# Altium PCB DS1307.PcbDoc
Units mil, origin at the board's own origin, x right, y up, seen from the top; angles counter-clockwise.
Board outline 2810 x 2472.01 mil, 2 copper layers (Top Layer, Bottom Layer); 38 components, 48 nets, 155 pads, 21 vias.
Unrouted connection lines stored in the file: 1.
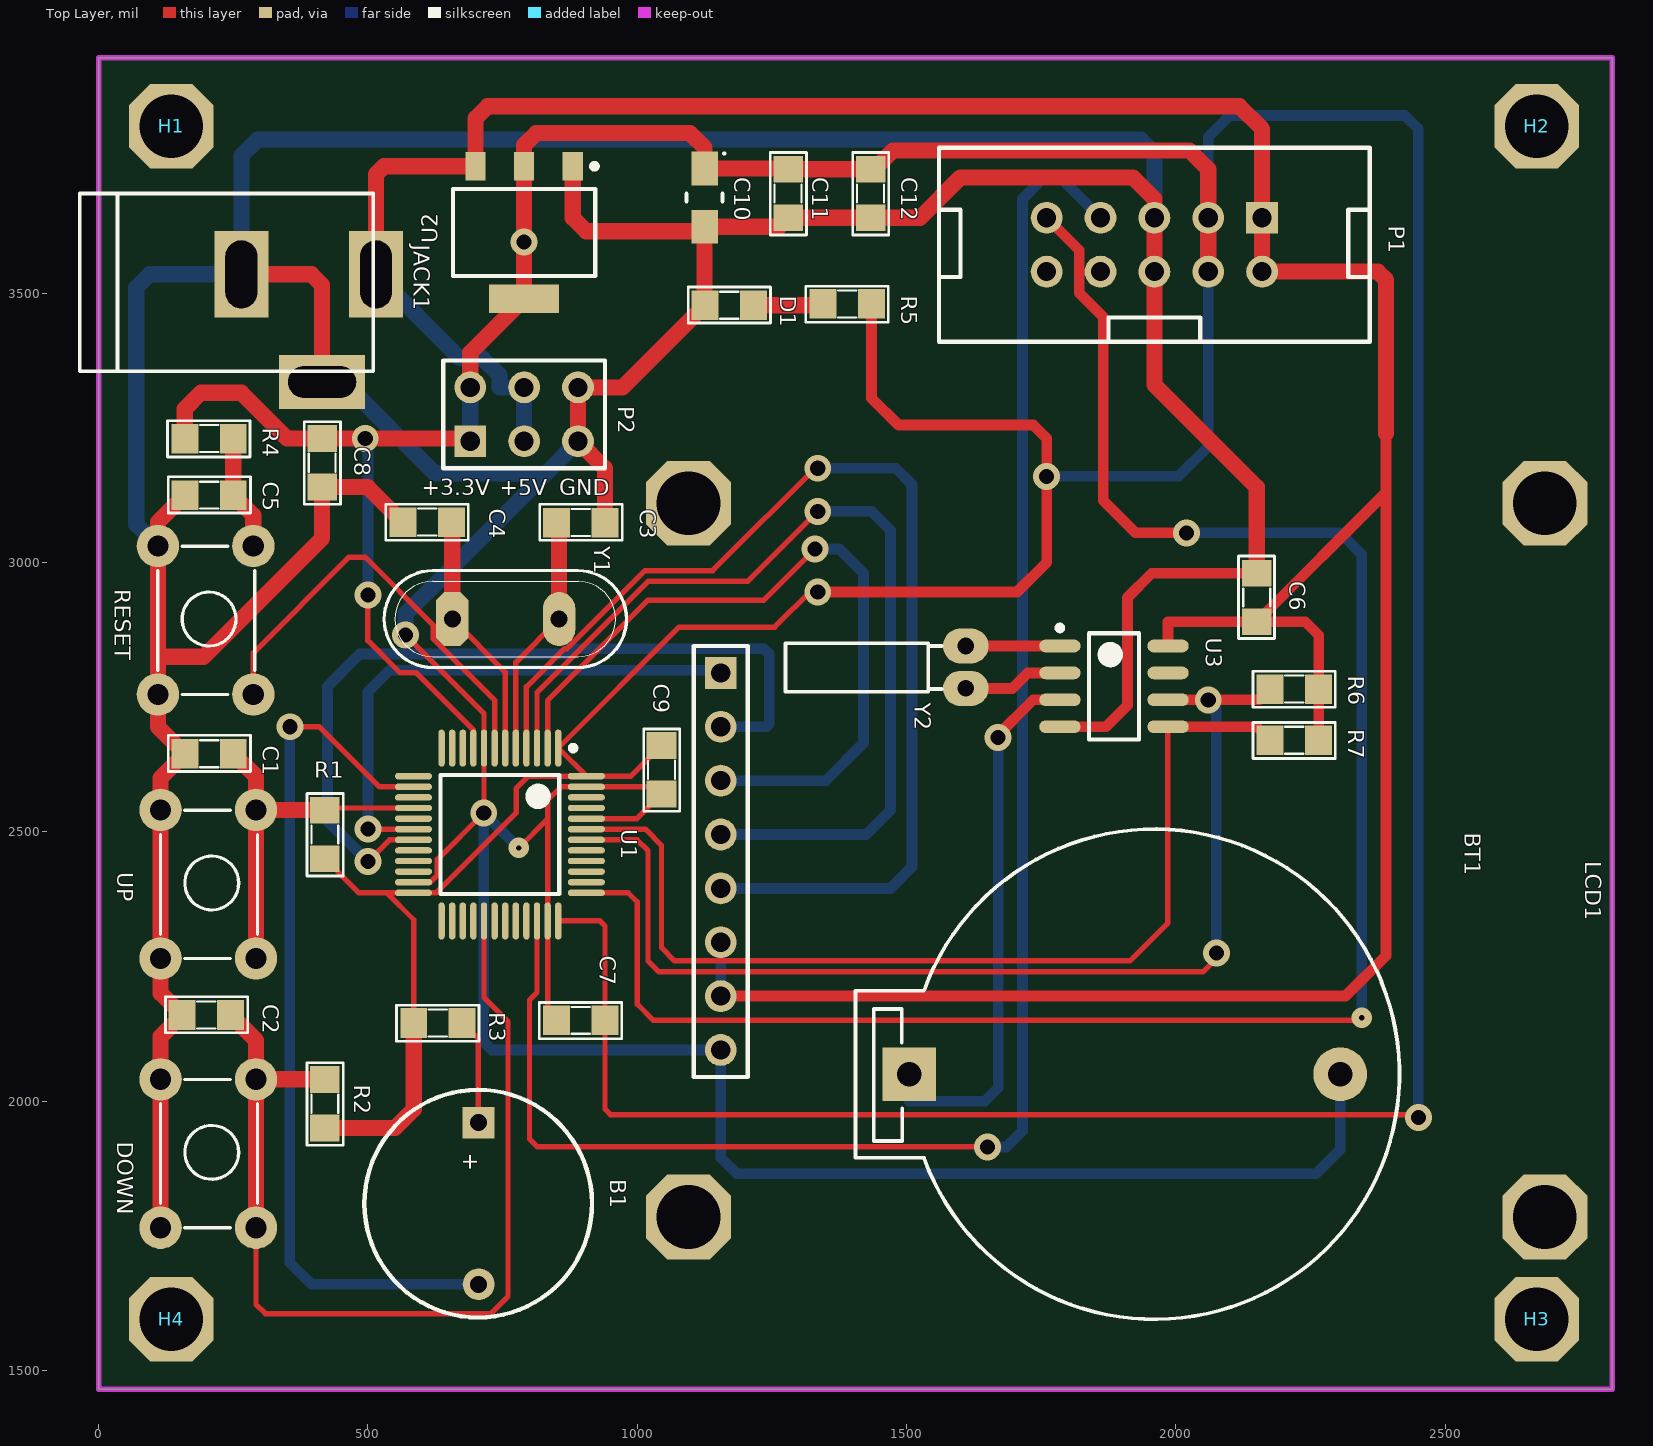
[diagram p0: Top Layer view]
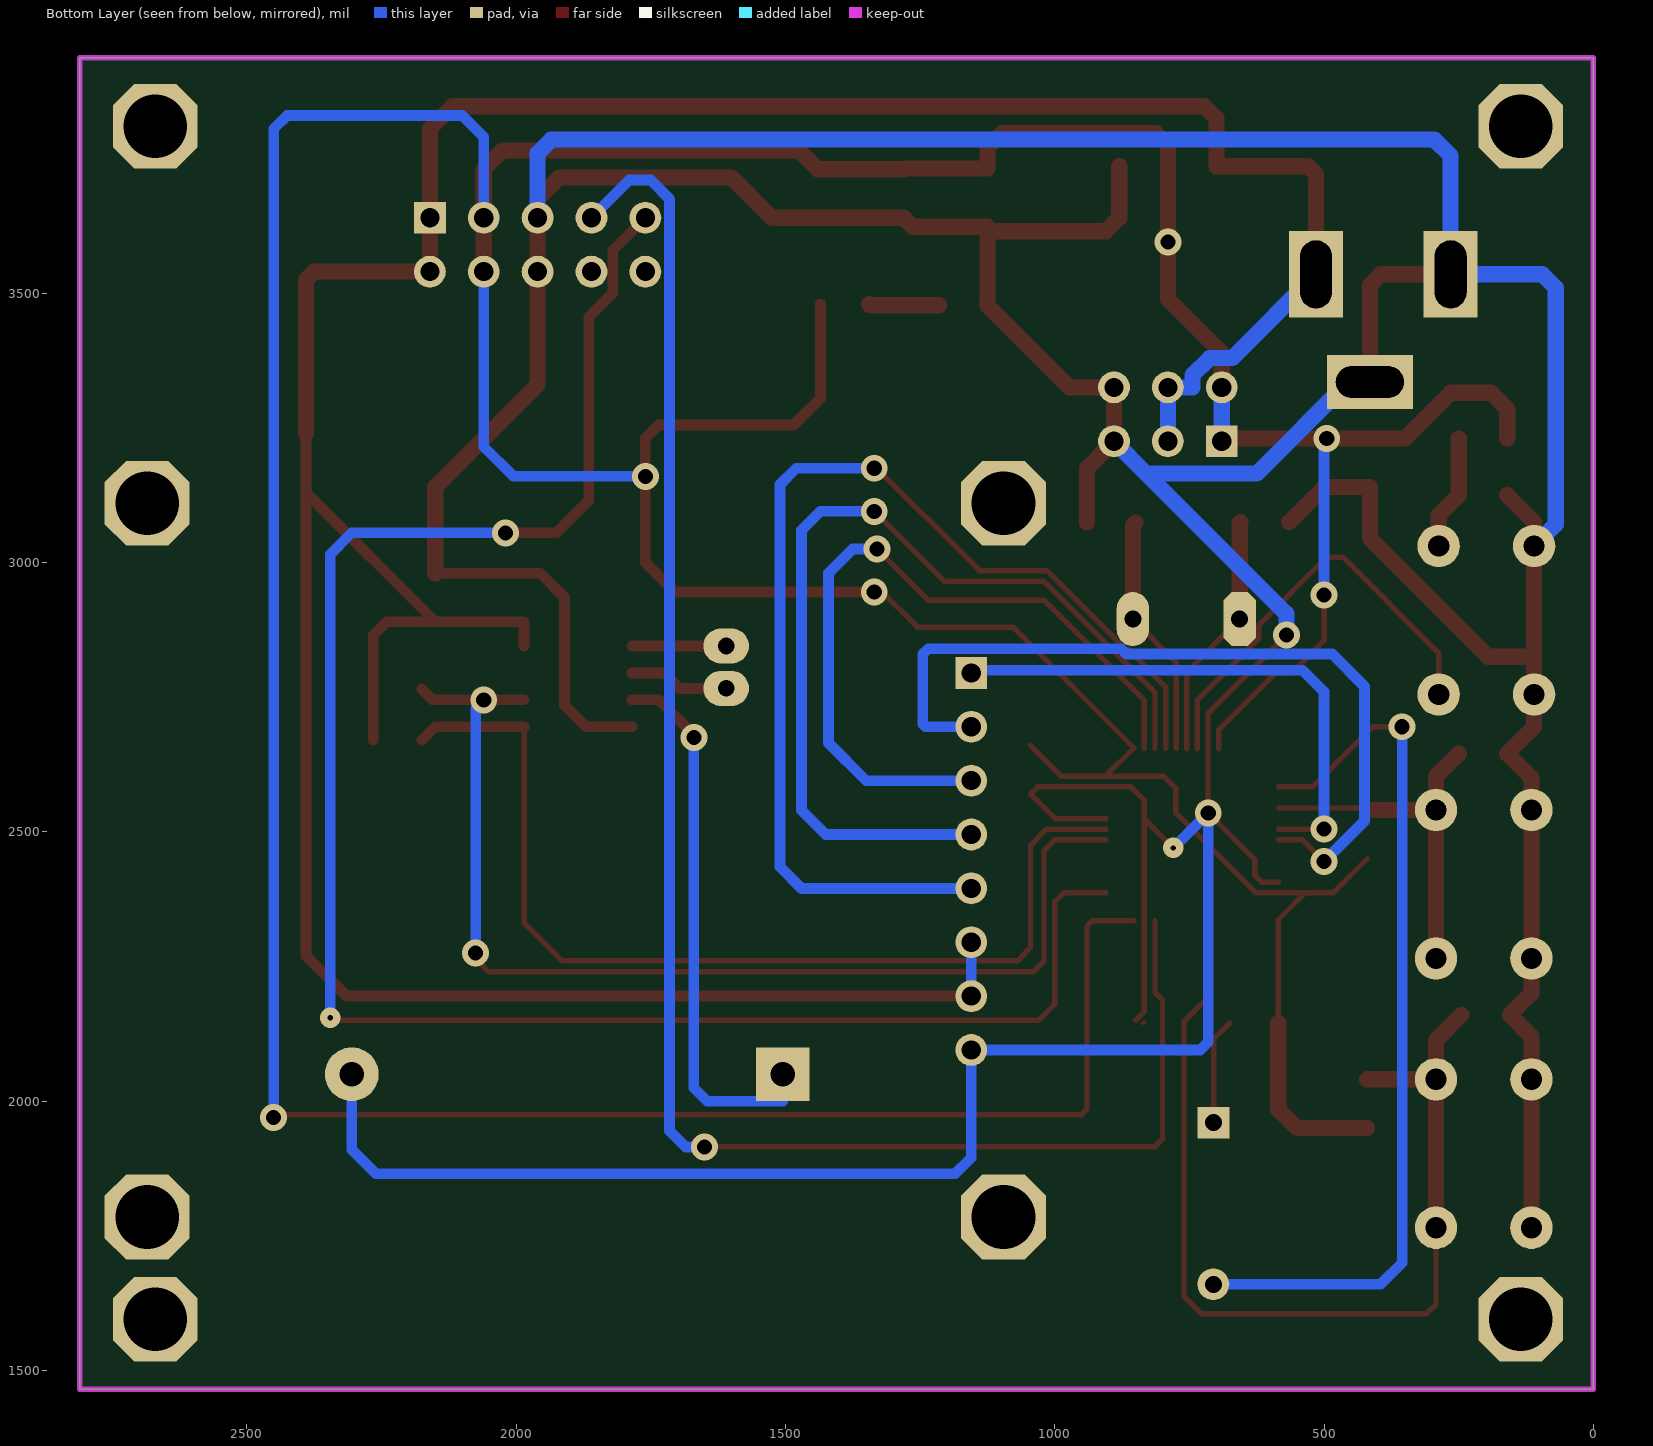
[diagram p1: Bottom Layer view, seen from below]

## Layer stack, top to bottom
Top Solder: solder mask 0.4, Solder Resist, Dk 3.5
Top Layer: signal copper 1.4
Dielectric 1: dielectric 12.6, FR-4, Dk 4.8
Bottom Layer: signal copper 1.4
Bottom Solder: solder mask 0.4, Solder Resist, Dk 3.5

## Board outline
0,1465 2810,1465 2810,3937.01 0,3937.01

## Design rules (kind name [scope] priority, off if disabled: settings)
Clearance MCU [HasFootprint('LQFP 48 Pin')] p1: gap=5
Clearance [All] p2: gap=20
PolygonConnect [All] p1: connectstyle=Relief reliefconductorwidth=10 reliefentries=4 polygonreliefangle="90 Angle" airgapwidth=10
RoutingVias [All] p1: holewidth=10 width=38 viastyle="Through Hole" minholewidth=10 minwidth=38 maxholewidth=10 maxwidth=38
SolderMaskExpansion [All] p1: expansion=4
Width [All] p1: maxlimit=30 minlimit=10 preferedwidth=20
30 further rules are at their usual default settings.

## Classes and differential pairs
component class KIT_STM32_Version3: B1 BT1 C1 C2 C3 C4 C5 C6 C7 C8 C9 C10 C11 C12 D1 H1 H2 H3 H4 JACK1 LCD1 P2 R1 R2 R3 R4 R6 R7 RESET S3 U2 U3 UP Y1 Y2

## Components (designator, comment, footprint, x,y, rotation, side; value= is the part's Value field where it differs from the comment)
B1 "BUZZER" SPEAKER 705,1960 r270 top
BT1 "PIN 3V" PIN3V 1505,2050 r0 top
C1 "100nF" "0805 CAP" 205,2645 r180 top
C2 "100nF" "0805 CAP" 200,2160 r180 top
C3 "20pF" "0805 CAP" 895,3074 r180 top
C4 "20pF" "0805 CAP" 610,3075 r0 top
C5 "100nF" "0805 CAP" 205,3125 r180 top
C6 "104" "0805 CAP" 2150,2935 r270 top
C7 "104" "0805 CAP" 895,2150 r0 top
C8 "104" "0805 CAP" 415,3185 r90 top
C9 "104" "0805 CAP" 1045,2615 r90 top
C10 "10uF" CAPMP3216X16N 1125,3677.48 r270 top
C11 "105" "0805 CAP" 1280,3685 r90 top
C12 "104" "0805 CAP" 1433.11,3685 r90 top
D1 "LED" "LED SMD 0805" 1170,3475 r180 top
DOWN "" "SW 4PIN" 115,1765 r90 top (schematic designator S2)
H1 "HOLE" HOLE 135,3810 r0 top
H2 "HOLE" HOLE 2670,3810 r0 top
H3 "HOLE" HOLE 2670,1595 r0 top
H4 "HOLE" HOLE 135,1595 r0 top
JACK1 "JACK DC" "JACK DC" 390,3435 r0 top
LCD1 "LCD 5110" "LCD 5110" 1155,2795 r270 top
P1 "ST-LINK" "IDC10 MALE" 2160,3640 r180 top
P2 "Header 3X2" HDR2X3 690,3225 r0 top
R1 "10k" "0805 RESISTOR" 420,2495 r90 top
R2 "10k" "0805 RESISTOR" 420,1995 r90 top
R3 "0" "0805 RESISTOR" 630,2145 r0 top
R4 "10k" "0805 RESISTOR" 205,3230 r0 top
R5 "1k" "0805 RESISTOR" 1390,3480 r0 top
R6 "4.7k" "0805 RESISTOR" 2220,2765 r0 top
R7 "4.7k" "0805 RESISTOR" 2220,2670 r0 top
RESET "" "SW 4PIN" 110,2755 r90 top (schematic designator S3)
U1 "STM32F103x8/B-LQFP48" "LQFP 48 PIN" 745,2495 r270 top
U2 "AMS1117" "SOT223 - 3 LEAD" 790,3612.52 r270 top
U3 "DS1307" "SOIC 8PIN" 1885,2770 r0 top
UP "" "SW 4PIN" 115,2265 r90 top (schematic designator S1)
Y1 "8MHz" "CRYSTAL DIP" 755,2895 r0 top
Y2 "32.768KHz" "XTAL 32kHz" 1610,2845 r180 top

## Footprints (in the part's own frame and the unit in brackets; to place one, negate y for a bottom-side part, rotate by r counter-clockwise, add the part's x,y. Pads: shape width x height; smd on the part's side, far side on the other; paste and mask are expansions set on the pad)
"0805 CAP" [mil] "Compoment SMD 80x50mil"
  rect 50x55 smd: 1(-45,0) 2(45,0)
  silkscreen extent -77,-34 76,33, body extent -40,-25 40,25, height 24
"0805 RESISTOR" [mil] "Compoment SMD 80x50mil"
  rect 50x55 smd: 1(-45,0) 2(45,0)
  silkscreen extent -77,-34 76,33, body extent -39,-25 39,25, height 24
CAPMP3216X16N [mm] "Molded Capacitor, 2-Leads, Body 3.20x1.60mm, IPC Medium Density"
  rect 1.6x1.25 smd: 1(-1.375,0) 2(1.375,0)
  silkscreen extent -2.12,-0.85 0.18,0.97, body extent -1.7,-0.9 1.7,0.9, height 1.8
"CRYSTAL DIP" [mil]
  oct 60x100 hole 31.5: 1(-98.43,0)
  oval 60x100 hole 31.5: 2(100,0)
  silkscreen extent -225,-90 225,90, body extent -221,-93 225,91, height 138
HDR2X3 [mm] "Connector; Header; 3x2 Position"
  rect 1.5x1.5 hole 0.9: 1(0,0)
  round 1.5 hole 0.9: 2(0,2.54) 3(2.54,0) 4(2.54,2.54) 5(5.08,0) 6(5.08,2.54)
  silkscreen extent -1.27,-1.27 6.35,3.81, body extent -1.27,-1.27 6.35,3.81, height 7
HOLE [mm]
  oct 4x4 hole 3: H(0,0)
"IDC10 MALE" [mm] "Connector; Header; 5x2 Position"
  rect 1.5x1.5 hole 0.9: 1(0,0)
  round 1.5 hole 0.9: 2(0,2.54) 3(2.54,0) 4(2.54,2.54) 5(5.08,0) 6(5.08,2.54) 7(7.62,0) 8(7.62,2.54) 9(10.16,0) 10(10.16,2.54)
  silkscreen extent -5.08,-3.3 15.24,5.84, body extent -5.08,-3.28 15.24,5.82, height 9
"JACK DC" [mil] "Jac DC input"
  rect 100x160 hole 59.06 slot 125.98 at 90 deg: 1(125,100) 2(-125,100)
  rect 160x100 hole 59.06 slot 125.98 at 0 deg: 3(25,-100)
  silkscreen extent -425,-80 120,250, body extent -410,-105 134,269, height 434
"LCD 5110" [mm]
  rect 1.5x1.5 hole 0.9: 1(0,0)
  round 1.5 hole 0.9: 2(2.54,0) 3(5.08,0) 4(7.62,0) 5(10.16,0) 6(12.7,0) 7(15.24,0) 8(17.78,0)
  oct 4x4 hole 3: ""(-8.001,38.862) ""(-8.001,-1.524) ""(25.654,38.862) ""(25.654,-1.524)
  silkscreen extent -1.27,-1.27 19.05,1.27, body extent -12.46,-4 30.24,41.4, height 14
"LED SMD 0805" [mil] "Compoment SMD 80x50mil"
  rect 50x55 smd: 1(-45.39,-2.58) 2(44.61,-2.58)
  silkscreen extent -77,-37 76,30, body extent -41,-21 41,15, height 33
"LQFP 48 PIN" [mm] "TSQFP, 48-Leads, Body 9.2x9.2mm (max), Pitch 0.50mm, IPC Medium Density"
  oval 1.75x0.3 smd: 1(-4.075,2.75) 2(-4.075,2.25) 3(-4.075,1.75) 4(-4.075,1.25) 5(-4.075,0.75) 6(-4.075,0.25) 7(-4.075,-0.25) 8(-4.075,-0.75) 9(-4.075,-1.25) 10(-4.075,-1.75) 11(-4.075,-2.25) 12(-4.075,-2.75) 25(4.075,-2.75) 26(4.075,-2.25) 27(4.075,-1.75) 28(4.075,-1.25) 29(4.075,-0.75) 30(4.075,-0.25) 31(4.075,0.25) 32(4.075,0.75) 33(4.075,1.25) 34(4.075,1.75) 35(4.075,2.25) 36(4.075,2.75)
  oval 0.3x1.75 smd: 13(-2.75,-4.075) 14(-2.25,-4.075) 15(-1.75,-4.075) 16(-1.25,-4.075) 17(-0.75,-4.075) 18(-0.25,-4.075) 19(0.25,-4.075) 20(0.75,-4.075) 21(1.25,-4.075) 22(1.75,-4.075) 23(2.25,-4.075) 24(2.75,-4.075) 37(2.75,4.075) 38(2.25,4.075) 39(1.75,4.075) 40(1.25,4.075) 41(0.75,4.075) 42(0.25,4.075) 43(-0.25,4.075) 44(-0.75,4.075) 45(-1.25,4.075) 46(-1.75,4.075) 47(-2.25,4.075) 48(-2.75,4.075)
  silkscreen extent -4.2,-2.8 2.8,3.58, body extent -4.5,-4.5 4.5,4.5, height 1.45
PIN3V [mil] "Socket PIN 3V"
  rect 100x100 hole 45: 1(0,0)
  round 100 hole 45: 2(800,0)
  silkscreen extent -100,-455 910,455, body extent -128,-447 1002,449, height 278
"SOIC 8PIN" [mm]
  oval 1.95x0.6 smd: 1(-2.55,1.905) 2(-2.55,0.635) 3(-2.55,-0.635) 4(-2.55,-1.905) 5(2.55,-1.905) 6(2.55,-0.635) 7(2.55,0.635) 8(2.55,1.905)
  silkscreen extent -2.67,-2.5 1.18,2.88, body extent -3,-2.45 3,2.45, height 1.75
"SOT223 - 3 LEAD" [mm] "SOT223, 4-Leads, Body 6.7x6.7mm (max), Pitch 2.29mm, IPC Medium Density"
  rect 1.35x0.95 smd: 1(-3.125,2.29) 2(-3.125,0) 3(-3.125,-2.29)
  rect 1.35x3.3 smd: 4(3.125,0)
  silkscreen extent -3.25,-3.35 2.05,3.44, body extent -3.54,-3.25 3.54,3.25, height 1.65
SPEAKER [mm]
  rect 1.5x1.5 hole 0.8: 1(0,0)
  round 1.5 hole 0.8: 2(7.62,0.013)
  silkscreen extent -1.55,-5.38 9.18,5.36, body extent -5.67,-6 9.78,6, height 4
"SW 4PIN" [mm] "SW button 4pin, 250 x250 mil"
  round 2 hole 1: 1(0,0) 1(7,0) 2(0,-4.5) 2(7,-4.5)
  silkscreen extent 0,-4.57 6.98,0, body extent -0.52,-5.39 7.38,0.81, height 7
"XTAL 32kHz" [mil] "Crystal for 32,768kHz, 2pin"
  oval 85x65 hole 31: 1(0,0) 2(0,78.74)
  silkscreen extent 45,-5 335,85, body extent -5,-5 324,85, height 77

## Part data
C1 C2 C3 C4 C5 C6 C7 C8 C9 C11 C12: library part "CAP CERAMIC"
C10: library part CAPACITOR
DOWN RESET UP: library part SWITCH
P1: library part "Header 5X2"
R1 R2 R3 R4 R5 R6 R7: library part RESISTOR
Y1 Y2: library part Crystal

## Via types
v1: diameter 50, hole 28, Top Layer to Bottom Layer, 19 vias
v2: diameter 38, hole 10, Top Layer to Bottom Layer, 2 vias

## Nets (pads, with @x,y where several pads share a name; then routed paths per layer and width w, separated by ;. In a path a pad name is that pad's centre, name@x,y a point inside that pad or via, vN(x,y) a via of type N, cw(c..) or ccw(c..) an arc to the next point about the centre after c; other vN are vias at no path point)
+3.3V: C7.2 C8.2 C9.2 C10.1 C11.2 C12.2 P1.3 P1.4 P2.1 P2.2 R1.1 R2.1 R3.1 R4.1 R5.2 U1.1 U1.9 U1.24 U1.36 U1.48 U2.2 U2.4 | length 11715.6
  Top Layer w10: R1.1 483.27,2386.73 535,2386.73 ; v1(500,2940) 500,2855 560,2795 590,2795 695.79,2689.21 U1.9 ; R3.1 585,2336.73 535,2386.73 ; U1.36 930.43,2334.57 940,2325 C7.2 940,1985 950,1975 2445,1975 v1(2450,1970) ; C9.2 988.27,2603.27 U1.48 ; v1@1325,2950 1255,2880 1077.83,2880 U1.1 U1.48 ; 535,2386.73 U1.24 626.73,2386.73 775,2535 775,2580 798.27,2603.27 U1.48
  Top Layer w20: v1(1335,2945) 1705,2945 1760,3000 v1(1760,3160) 1760,3230 1735,3255 1485,3255 1435,3305 R5.2
  Top Layer w30: R4.1 160,3285 190,3315 265,3315 350,3230 C8.2 v1(495,3230) 685,3230 P2.1 ; R2.1 550,1950 585,1985 R3.1 ; P2.2 690,3389.49 U2.4 v1(790,3595) U2.2 790,3775 812.13,3797.13 1097.87,3797.13 1125,3770 C10.1 1278.38,3731.61 C11.2 C12.2 1440,3730 1475,3765 2025,3765 2060,3730 P1.3 P1.4
  Bottom Layer w20: v1(495,3230) 500,3225 v1(500,2940) ; v1(1760,3160) 2005,3160 2060,3215 P1.4 ; P1.3 2060,3790 2100,3830 2425,3830 2450,3805 v1(2450,1970)
  Bottom Layer w30: P2.1 P2.2
+5V: C6.2 JACK1.1 LCD1.6 LCD1.7 P1.1 P1.2 P2.3 P2.4 R6.2 R7.2 U2.3 U3.8 | length 6419.7
  Top Layer w20: LCD1.7 2315,2195 2390,2270 2390,3130 ; U3.8 1985.39,2890 C6.2 ; R7.2 R6.2 2265,2865 2240,2890 C6.2 ; 2390,3239.5 2390,3130 ; C6.2 2390,3130
  Top Layer w30: JACK1.1 515,3720.76 529.79,3735.55 U2.3 699.84,3824.84 722.13,3847.13 2117.87,3847.13 2160,3805 P1.1 P1.2 2375,3540 2390,3525 2390,3239.5
  Bottom Layer w20: LCD1.7 LCD1.6
  Bottom Layer w30: JACK1.1 670.47,3379.53 712.59,3379.53 744.53,3347.59 744.53,3325 P2.4 P2.3
BUZZER: B1.2 U1.14 | length 1637.8
  Top Layer w10: v1(355,2695) 410,2695 521.42,2583.58 U1.14
  Bottom Layer w20: v1(355,2695) 355,1700 395,1660 B1.2
CE: LCD1.2 U1.19 | length 1532.5
  Top Layer w10: v1(500,2445) 540.16,2485.16 U1.19
  Bottom Layer w20: v1(500,2445) 425,2520 425,2770 485,2830 866.57,2830 876.57,2840 1235,2840 1245,2830 1245,2700 1240,2695 LCD1.2
CLK: LCD1.5 U1.4 | length 2100.8
  Top Layer w10: U1.4 794.21,2769.21 865,2840 869.5,2840 1014.5,2985 1140,2985 v1@1340,3185
  Bottom Layer w20: LCD1.5 1470,2395 1510,2435 1510,3145 1480,3175 v1(1335,3175)
DATA: U1.25
DC: LCD1.3 U1.2 | length 1418.8
  Top Layer w10: U1.2 833.58,2743.58 1020,2930 1235,2930 v1(1330,3025)
  Bottom Layer w20: LCD1.3 1350,2595 1420,2665 1420,2980 1375,3025 v1(1330,3025)
DIN: LCD1.4 U1.3 | length 1766.9
  Top Layer w10: U1.3 813.9,2758.9 1020,2965 1205,2965 v1(1335,3095)
  Bottom Layer w20: LCD1.4 1425,2495 1470,2540 1470,3060 1435,3095 v1(1335,3095)
EN: U1.15
GND: BT1.2 C1.2 C2.2 C3.1 C4.1 C5.2 C6.1 C7.1 C8.1 C9.1 C10.2 C11.1 C12.1 D1.2 DOWN.1 JACK1.2 JACK1.3 LCD1.8 P1.5 P1.6 P2.5 P2.6 RESET.1 U1.8 U1.23 U1.35 U1.44 U1.47 U2.1 U3.4 UP.1 | length 13450.9
  Top Layer w7: C7.1@833.58,2146.42 C7.1@835,2145
  Top Layer w10: v1(570,2865) 715.47,2719.53 U1.8 v1@715.47,2519.53 ; U1.23 615.92,2406.42 629.02,2419.51 629.02,2449.02 v1(715,2535) ; v2(780,2470) 833.58,2523.58 ; C7.1 833.58,2166.42 U1.35 833.58,2523.58 ; U1.44 999.53,2524.53 C9.1 1031.42,2583.58 U1.47 858.58,2583.58 833.58,2558.58 833.58,2523.58
  Top Layer w20: U3.4 1870,2695 1910,2735 1910,2935 1955,2980 C6.1
  Top Layer w30: DOWN.1@115,1765 115,2040.59 115,2120 C2.2 115,2200 115,2265 115,2540.59 115,2600 C1.2 110,2695 110,2755 110,2825 ; C5.2 110,3075 110,3030.59 110,2825 ; JACK1.2 395,3535 415,3515 JACK1.3 ; C4.1 500,3140 C8.1 415,3045 195,2825 110,2825 ; U2.1 880.16,3639.84 905,3615 1116.65,3615 C10.2 ; C3.1 940,3175 P2.5 P2.6 972.82,3325 D1.2 1125,3477.97 C10.2 ; C6.1 2150,3140 1960,3330 P1.6 P1.5 1960,3675 1920,3715 1600,3715 1525,3640 C12.1 C11.1 1263.35,3623.35 C10.2
  Bottom Layer w20: v2(780,2470) v1(715,2535) 715,2110 730,2095 LCD1.8 1155,1895 1185,1865 2260,1865 2305,1910 2305,2000
  Bottom Layer w30: RESET.1@110,3030.59 70,3070.59 70,3510 95,3535 JACK1.2 265,3755 295,3785 1935,3785 1960,3760 P1.5 ; JACK1.3 455,3335 625,3165 830,3165 ; v1(570,2865) 570,2905 830,3165 ; P2.5 830,3165
JTCK: P1.9 U1.37 | length 3600.7
  Top Layer w10: U1.37 983.27,2386.73 1000,2370 1000,2180 1029.53,2150.47 v2@2340,2150.47
  Top Layer w20: P1.9 1820.47,3579.53 1820.47,3500.47 1865,3455.94 1865,3115 1925,3055 v1(2020,3055) ; v2@2340,2160 v2(2345,2155)
  Bottom Layer w20: v1(2020,3055) 2305,3055 2345,3015 v2(2345,2155)
JTDI: U1.38
JTMS: P1.7 U1.34 | length 3262.5
  Top Layer w10: U1.34 813.9,2201.75 800,2187.86 800,1930 815,1915 v1(1650,1915)
  Bottom Layer w20: v1(1650,1915) 1685,1915 1715,1945 1715,3675 1750,3710 1790,3710 P1.7
LED1: U1.41
LED2: U1.33
LED3: U1.32
LED4: U1.45
MISO: U1.26
NetB1_1: B1.1 R3.2 | length 197.4
  Top Layer w10: R3.2 705,2115 B1.1
NetBT1_1: BT1.1 U3.3 | length 974
  Top Layer w20: v1@1665,2675 1735,2745 U3.3
  Bottom Layer w20: BT1.1@1505,2000 1645,2000 1670,2025 v1(1670,2675)
NetD1_1: D1.1 R5.1 | length 130.6
  Top Layer w30: D1.1 1342.58,3477.58 R5.1
NetU3_1: U3.1 Y2.1 | length 174.6
  Top Layer w20: Y2.1 U3.1
NetU3_2: U3.2 Y2.2 | length 186.5
  Top Layer w20: Y2.2 1696.26,2766.26 1725,2795 U3.2
NRST: C5.1 R4.2 RESET.2 U1.7 | length 1027.5
  Top Layer w10: RESET.2@287.17,2755 287.17,2832.17 465,3010 495,3010 621.57,2883.43 621.57,2857.93 735.16,2744.34 U1.7
  Top Layer w30: R4.2 C5.1 287.17,3087.83 RESET.2@287.17,3030.59
NSS: U1.28
OSC_IN: C3.2 U1.5 Y1.2 | length 454
  Top Layer w10: U1.5 774.53,2814.53 Y1.2
  Top Layer w30: C3.2 855,3069 Y1.2
OSC_OUT: C4.2 U1.6 Y1.1 | length 460.9
  Top Layer w10: Y1.1 754.84,2796.73 U1.6
  Top Layer w30: C4.2 656.57,3073.43 Y1.1
RST: P1.10
RST1: U1.46
RST2: LCD1.1 U1.18 | length 1013.3
  Top Layer w10: v1(500,2505) 500.16,2504.84 U1.18
  Bottom Layer w20: v1(500,2505) 500,2760 540,2800 1150,2800 LCD1.1
RXD1: U1.31
RXD2: U1.13
RXD3: U1.22
SCK: U1.27
SCL1: R6.1 U1.42 U3.6 | length 2089.8
  Top Layer w10: U1.42 999.84,2485.16 1020,2465 1020,2260 1040,2240 2050,2240 v1@2085,2275
  Top Layer w20: U3.6 v1(2060,2745) 2155,2745 R6.1
  Bottom Layer w20: v1(2060,2745) 2075,2730 v1(2075,2275)
SDA1: R7.1 U1.43 U3.5 | length 1885.5
  Top Layer w10: U1.43 1015.16,2504.84 1045,2475 1045,2285 1069.53,2260.47 1914.53,2260.47 1985,2330.94 1985,2694.61 U3.5
  Top Layer w20: U3.5 2150,2695 R7.1
SW1: C1.1 R1.2 U1.16 UP.2 | length 691.9
  Top Layer w10: R1.2 424.21,2544.21 U1.16
  Top Layer w30: C1.1 292.17,2602.83 UP.2@292.17,2540.59 ; UP.2@292.17,2265 UP.2@292.17,2540.59 ; R1.2 419.41,2540.59 UP.2@292.17,2540.59
SW2: U1.17
SW3: C2.1 DOWN.2 R2.2 U1.29 | length 1888.7
  Top Layer w10: DOWN.2@292.17,1765 292.17,1622.83 309.53,1605.47 728.09,1605.47 760.03,1637.41 760.03,2147.83 715.47,2192.38 U1.29
  Top Layer w30: C2.1 292.17,2112.83 DOWN.2@292.17,2040.59 ; DOWN.2@292.17,1765 DOWN.2@292.17,2040.59 ; R2.2 419.41,2040.59 DOWN.2@292.17,2040.59
SW4: U1.20
SW5: U1.39
SW6: U1.40
SWIM: P1.8
TXD1: U1.30
TXD2: U1.12
TXD3: U1.21
VOUT: U1.10
VR: U1.11
pads on no net: H1.H H2.H H3.H H4.H LCD1. U3.7

## Keep-outs
Keep-Out Layer:
  the board outline again, w10

## Silkscreen, mask and mechanical layers (free items; w line width, h text height)
Top Overlay:
  text "+3.3V" at 600,3125 h30
  text "+5V" at 745,3125 h30
  text "GND" at 855,3125 h30

## Text inside footprints (layer, text, board x,y; h text height)
B1: Top Overlay "+" at 677,1904.5 h30 r270